# EAGLE board 6301_FP_second_try (EAGLE 7.7.0)
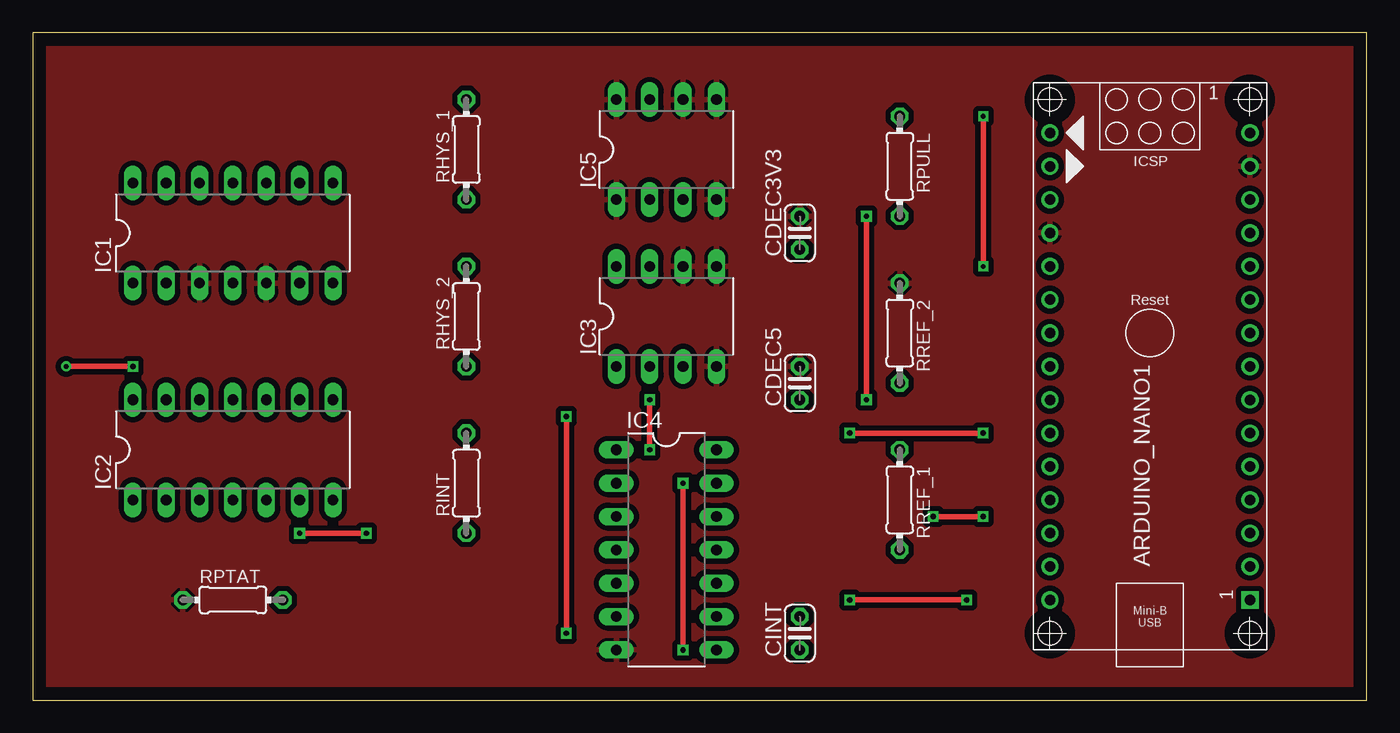
[diagram p0: board, top side]
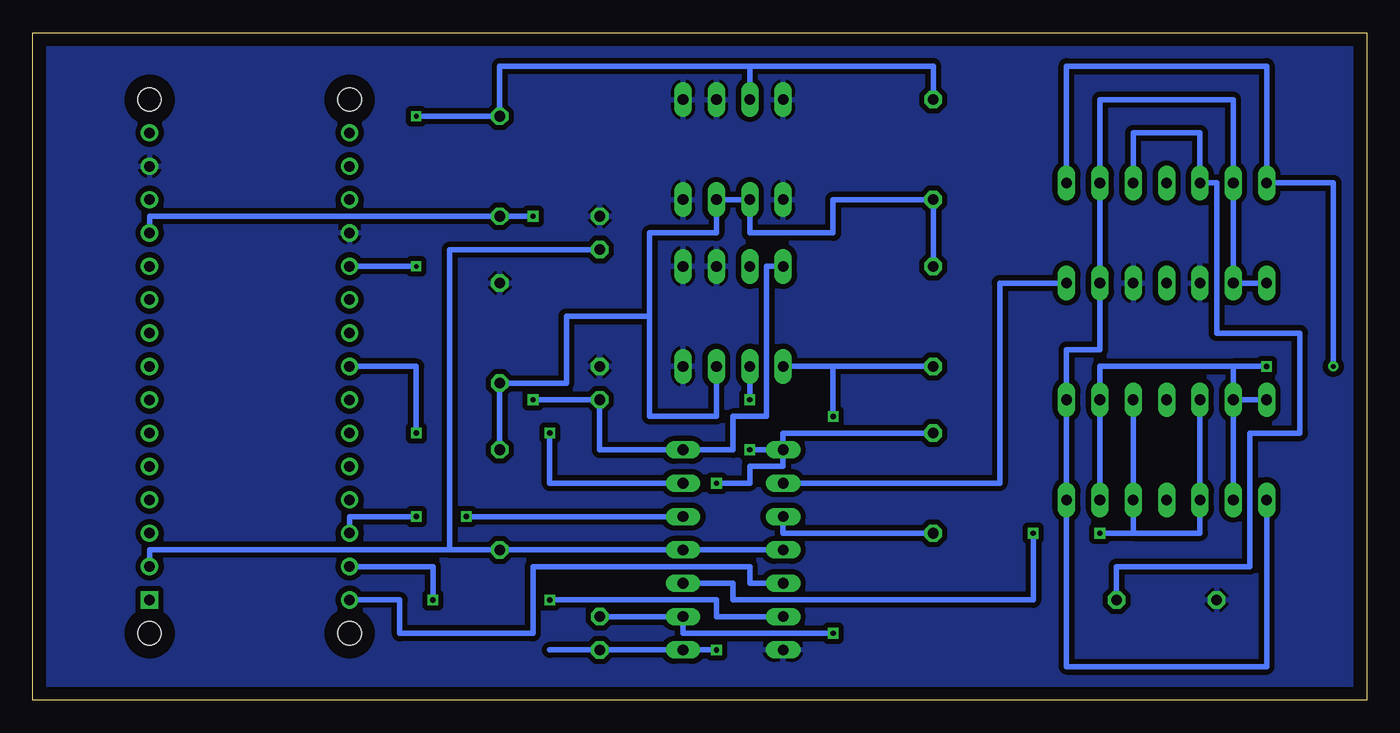
[diagram p1: board, bottom side, seen from below]

Size 101.6 x 50.8 mm. Coordinates in mm from the lower left corner, seen from the top.
Outline: 0,0 101.6,0 101.6,50.8 0,50.8 0,0
Copper layers (1*16): Top 0.035mm / dielectric 1.5mm / Bottom 0.035mm
Design rules "default *": minimum track width 10mil, minimum drill 24mil, track to track 16mil, track to pad 16mil, pad to pad 16mil, via to via 16mil, smd to smd 16mil, copper to edge 40mil, drill to drill 16mil, minimum pad ring 10mil, minimum via ring 8mil, stop-mask expansion 4mil, vias tented up to drill 0mil, thermal gap 10mil
Net classes: 0 default: width 0.406 mm, drill 0.406 mm, clearance 0.406 mm

## Footprints (pad centres in the part's own frame; a part is rotated, then mirrored left to right if it is on the bottom)
ARDUINO_NANO = drill 0.8 square: 1 -20.32,-7.62 | drill 0.8: 2 -17.78,-7.62; 3 -15.24,-7.62; 4 -12.7,-7.62; 5 -10.16,-7.62; 6 -7.62,-7.62; 7 -5.08,-7.62; 8 -2.54,-7.62; 9 0,-7.62; 10 2.54,-7.62; 11 5.08,-7.62; 12 7.62,-7.62; 13 10.16,-7.62; 14 12.7,-7.62; 15 15.24,-7.62; 16 15.24,7.62; 17 12.7,7.62; 18 10.16,7.62; 19 7.62,7.62; 20 5.08,7.62; 21 2.54,7.62; 22 0,7.62; 23 -2.54,7.62; 24 -5.08,7.62; 25 -7.62,7.62; 26 -10.16,7.62; 27 -12.7,7.62; 28 -15.24,7.62; 29 -17.78,7.62; 30 -20.32,7.62 | hole 1.778: -22.86,-7.62; -22.86,7.62; 17.78,7.62; 17.78,-7.62
C025-024X044 = drill 0.813 octagon: 1 -1.27,0; 2 1.27,0
DIL14 = drill 0.813 long: 1 -7.62,-3.81; 2 -5.08,-3.81; 3 -2.54,-3.81; 4 0,-3.81; 5 2.54,-3.81; 6 5.08,-3.81; 7 7.62,-3.81; 8 7.62,3.81; 9 5.08,3.81; 10 2.54,3.81; 11 0,3.81; 12 -2.54,3.81; 13 -5.08,3.81; 14 -7.62,3.81
DIL08 = drill 0.813 long: 1 -3.81,-3.81; 2 -1.27,-3.81; 3 1.27,-3.81; 4 3.81,-3.81; 5 3.81,3.81; 6 1.27,3.81; 7 -1.27,3.81; 8 -3.81,3.81
0204/7 = drill 0.813 octagon: 1 -3.81,0; 2 3.81,0

## Placement (x,y rotation side)
ARDUINO_NANO1  [ARDUINO_NANO]  85.09,27.94 90 top
CDEC3V3  [C025-024X044]  58.42,35.56 90 top
CDEC5  [C025-024X044]  58.42,24.13 90 top
CINT  [C025-024X044]  58.42,5.08 90 top
IC1  MPQ3904  [DIL14]  15.24,35.56 0 top
IC2  MPQ3906  [DIL14]  15.24,19.05 0 top
IC3  TL072P  [DIL08]  48.26,29.21 0 top
IC4  CD4066BE  [DIL14]  48.26,11.43 270 top
IC5  LM311N  [DIL08]  48.26,41.91 0 top
RHYS_1  [0204/7]  33.02,41.91 90 top
RHYS_2  [0204/7]  33.02,29.21 90 top
RINT  [0204/7]  33.02,16.51 90 top
RPTAT  [0204/7]  15.24,7.62 0 top
RPULL  [0204/7]  66.04,40.64 270 top
RREF_1  [0204/7]  66.04,15.24 270 top
RREF_2  [0204/7]  66.04,27.94 270 top

## Library data of the parts
ARDUINO_NANO1 IC1-IC5 = 6301-temp-sensor-rev1
CDEC3V3 CDEC5 CINT RHYS_1 RHYS_2 RINT RPTAT RPULL RREF_1 RREF_2 = rcl

## Nets
3V3: ARDUINO_NANO1.2 CDEC3V3.1 IC4.4 IC4.11 RREF_1.2
5V: ARDUINO_NANO1.12 CDEC5.1 IC3.8 IC4.14 RPULL.2
GND: ARDUINO_NANO1.14 ARDUINO_NANO1.19 CDEC3V3.2 CDEC5.2 IC1.3 IC1.5 IC3.4 IC3.5 IC3.6 IC4.7 IC5.1 IC5.4 IC5.5 IC5.6 IC5.8 RPTAT.1 RREF_2.1
N$1: IC4.3 RINT.1
N$2: IC1.10 IC1.12 RPTAT.2
N$3: IC1.8 IC1.14 IC2.2 IC2.6 IC2.9 IC2.13 IC2.14
N$4: ARDUINO_NANO1.20 IC5.7 RHYS_1.2 RPULL.1
N$5: IC1.1 IC1.2 IC1.6 IC1.9 IC1.13 IC2.1 IC2.7 IC2.8
N$6: CINT.2 IC3.1 IC4.9 RHYS_2.1
N$9: IC1.7 IC4.2
N$10: CINT.1 IC3.2 IC4.1 IC4.8 RINT.2
START: IC2.3 IC2.5 IC2.10 IC2.12 IC4.10
SW_A: ARDUINO_NANO1.23 IC4.13
SW_B: ARDUINO_NANO1.30 IC4.5
SW_C: ARDUINO_NANO1.29 IC4.6
SW_D: ARDUINO_NANO1.28 IC4.12
VIN: ARDUINO_NANO1.15
VREF: IC3.3 IC5.2 IC5.3 RHYS_1.1 RHYS_2.2 RREF_1.1 RREF_2.2

## Tracks (layer width: path | path; a pad name or v marks a point on that pad's centre or on a via)
3V3
  Bottom 0.406: CDEC3V3.1 69.85,34.29 69.85,11.43 | 69.85,11.43 RREF_1.2 IC4.11 IC4.4 | 69.85,11.43 92.71,11.43 ARDUINO_NANO1.2
5V  (via drill 0.41)
  Top 0.406: v63.5,22.86 v63.5,36.83
  Bottom 0.406: ARDUINO_NANO1.12 92.71,36.83 RPULL.2 v63.5,36.83 | IC3.8 45.72,33.02 45.72,21.59 48.26,21.59 48.26,19.05 IC4.14 58.42,19.05 CDEC5.1 v63.5,22.86
GND
  pour Top: 0,50.8 0,0 101.6,0 101.6,50.8
  pour Bottom: 0,50.8 0,0 101.6,0 101.6,50.8
N$1
  Bottom 0.406: RINT.1 44.45,12.7 IC4.3
N$2
  Bottom 0.406: IC1.10 17.78,43.18 12.7,43.18 IC1.12 11.43,39.37 11.43,27.94 5.08,27.94 5.08,20.32 8.89,20.32 8.89,10.16 19.05,10.16 RPTAT.2
N$3  (via drill 0.36, 0.41)
  Top 0.406: v2.54,25.4 v7.62,25.4
  Bottom 0.406: IC1.8 22.86,48.26 7.62,48.26 IC1.14 2.54,39.37 v2.54,25.4 | IC2.14 IC2.13 | IC2.13 IC2.2 | IC2.6 IC2.9 20.32,25.4 10.16,25.4 | 10.16,25.4 IC2.13 | v7.62,25.4 10.16,25.4
N$4  (via drill 0.36)
  Top 0.406: v72.39,33.02 v72.39,44.45
  Bottom 0.406: RHYS_1.2 33.02,48.26 46.99,48.26 | IC5.7 46.99,48.26 | 46.99,48.26 66.04,48.26 RPULL.1 v72.39,44.45 | v72.39,33.02 ARDUINO_NANO1.20
N$5
  Bottom 0.406: IC1.1 IC1.2 IC1.13 10.16,45.72 20.32,45.72 IC1.9 IC1.6 20.32,26.67 22.86,26.67 IC2.8 IC2.7 22.86,2.54 7.62,2.54 IC2.1
N$6  (via drill 0.41)
  Top 0.406: v40.64,5.08 v40.64,21.59
  Bottom 0.406: RHYS_2.1 40.64,25.4 | 40.64,25.4 IC3.1 | CINT.2 IC4.9 52.07,5.08 v40.64,5.08 | v40.64,21.59 40.64,25.4
N$9
  Bottom 0.406: IC1.7 27.94,31.75 27.94,16.51 IC4.2
N$10  (via drill 0.41)
  Top 0.406: v46.99,19.05 v46.99,22.86 | v49.53,16.51 v49.53,3.81
  Bottom 0.406: RINT.2 44.45,20.32 IC4.1 | 62.23,3.81 CINT.1 IC4.8 v49.53,3.81 | IC4.1 v46.99,19.05 | v46.99,22.86 IC3.2 | v49.53,16.51 46.99,16.51 46.99,17.78 44.45,17.78 IC4.1
START  (via drill 0.41)
  Top 0.406: v20.32,12.7 v25.4,12.7
  Bottom 0.406: 17.78,12.7 IC2.5 IC2.10 | 17.78,12.7 12.7,12.7 IC2.3 IC2.12 | 17.78,12.7 v20.32,12.7 | v25.4,12.7 25.4,7.62 48.26,7.62 48.26,8.89 IC4.10
SW_A  (via drill 0.41)
  Top 0.406: v62.23,20.32 v72.39,20.32
  Bottom 0.406: IC4.13 62.23,16.51 v62.23,20.32 | v72.39,20.32 72.39,25.4 ARDUINO_NANO1.23
SW_B
  Bottom 0.406: IC4.5 46.99,8.89 46.99,10.16 63.5,10.16 63.5,5.08 73.66,5.08 73.66,7.62 ARDUINO_NANO1.30
SW_C  (via drill 0.41)
  Top 0.406: v62.23,7.62 v71.12,7.62
  Bottom 0.406: IC4.6 49.53,6.35 49.53,7.62 v62.23,7.62 | v71.12,7.62 71.12,10.16 ARDUINO_NANO1.29
SW_D  (via drill 0.41)
  Top 0.406: v68.58,13.97 v72.39,13.97
  Bottom 0.406: IC4.12 v68.58,13.97 | v72.39,13.97 77.47,13.97 ARDUINO_NANO1.28
VREF
  Bottom 0.406: RHYS_2.2 RHYS_1.1 40.64,38.1 40.64,35.56 46.99,35.56 IC5.2 IC5.3 49.53,35.56 54.61,35.56 54.61,29.21 | RREF_1.1 RREF_2.2 60.96,24.13 60.96,29.21 54.61,29.21 | 54.61,29.21 54.61,21.59 49.53,21.59 IC3.3